# Altium PCB RobotCtrl.PcbDoc
Units mil, origin at the board's own origin, x right, y up, seen from the top; angles counter-clockwise.
Board outline 23735 x 12540 mil, 2 copper layers (Top Layer, Bottom Layer); 127 components, 102 nets, 564 pads, 4 vias.
Unrouted connection lines stored in the file: 342.
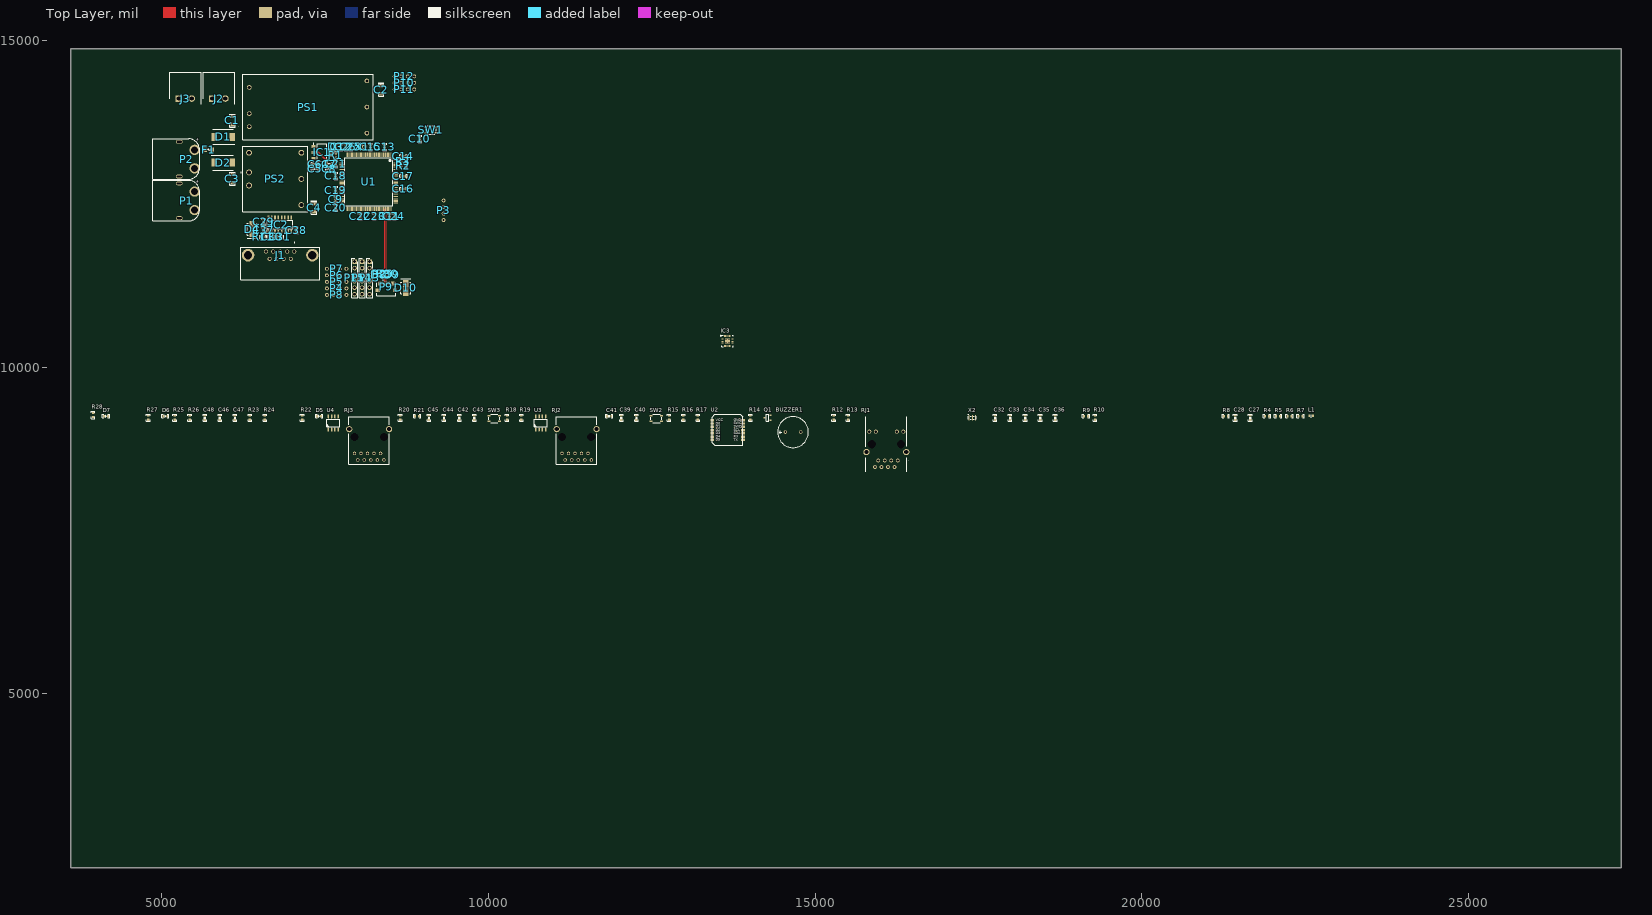
[diagram p0: Top Layer view]
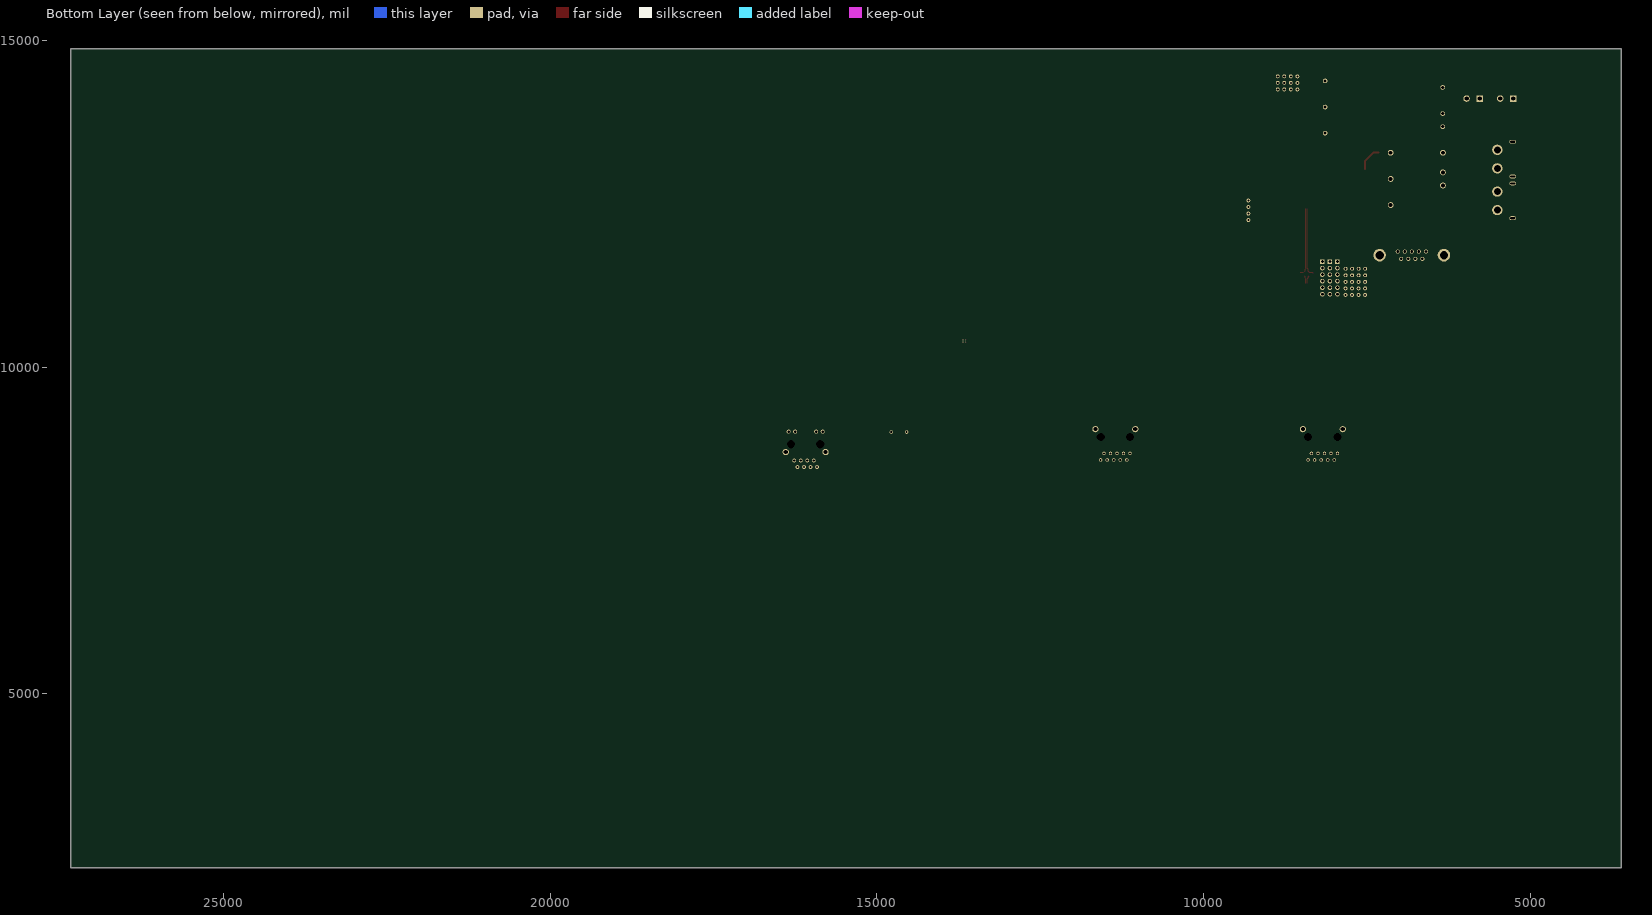
[diagram p1: Bottom Layer view, seen from below]

## Layer stack, top to bottom
Top Solder: solder mask 0.4, Solder Resist, Dk 3.5
Top Layer: signal copper 1.4
Dielectric 1: dielectric 12.6, FR-4, Dk 4.8
Bottom Layer: signal copper 1.4
Bottom Solder: solder mask 0.4, Solder Resist, Dk 3.5

## Board outline
3605,2335 3605,14875 27340,14875 27340,2335

## Design rules (kind name [scope] priority, off if disabled: settings)
Clearance [All] p1: gap=10 ignorepadtopadclearanceinfootprint=FALSE except(0: Arc-Arc Arc-Track Arc-SMDPad Track-Track Track-SMDPad SMDPad-SMDPad)
DiffPairsRouting [All] p1: maxlimit=10 minlimit=10 mostfreqgap=10 toplayer_minwidth=10 toplayer_maxwidth=15 toplayer_prefwidth=15 bottomlayer_minwidth=10 bottomlayer_maxwidth=15 bottomlayer_prefwidth=15 maxuncoupledlength=500
PlaneConnect [All] p1: planeconnectstyle=Direct reliefexpansion=20 reliefentries=4 reliefconductorwidth=10 reliefairgap=10
PolygonConnect [All] p1: connectstyle=Direct reliefconductorwidth=10 reliefentries=4 polygonreliefangle="90 Angle" airgapwidth=10
RoutingVias [All] p1: holewidth=17.72 width=29.53 viastyle="Through Hole" minholewidth=17.72 minwidth=29.53 maxholewidth=17.72 maxwidth=29.53
SolderMaskExpansion [All] p1: expansion=4 istentingtop=FALSE
Width [All] p1: maxlimit=1000 minlimit=10 preferedwidth=12
28 further rules are at their usual default settings.

## Classes and differential pairs
component class U_Power: C1 C2 C3 C4 C5 C6 C7 C8 D1 D2 D3 F1 IC1 J2 J3 P1 P2 PS1 PS2 R1
component class U_MCU: C9 C10 C11 C12 C13 C14 C15 C16 C17 C18 C19 C20 C21 C22 C23 C24 C25 C26 P3 R2 R3 SW1 U1 X1
component class U_Dev: BUZZER1 C27 C28 C29 C30 C31 C32 C33 C34 C35 C36 C37 C38 C39 C40 C41 C42 C43 C44 C45 C46 C47 C48 D4 D5 D6 D7 D8 D9 D10 IC2 IC3 J1 L1 P4 P5 P6 P7 P8 P9 P10 P11 P12 P13 P14 P15 Q1 R4 R5 R6 R7 R8 R9 R10 R11 R12 R13 R14 R15 R16 R17 R18 R19 R20 R21 R22 R23 R24 R25 R26 R27 R28 R29 R30 RJ1 RJ2 RJ3 SW2 SW3 U2 U3 U4 X2
differential pair USB_D: +USB_D_P -USB_D_N
differential pair CAN2: +CAN2_P -CAN2_N
differential pair CAN1: +CAN1_P -CAN1_N

## Components (designator, comment, footprint, x,y, rotation, side; value= is the part's Value field where it differs from the comment)
BUZZER1 "TMB12A12" DIP,P=7.6mm 14660,9005 r0 top
C1 "100nF" CAP-AUX-3216 6090,13760 r270 top
C2 "100nF" CAP-AUX-3216 8350,14260 r90 top
C3 "100nF" CAP-AUX-3216 6090,12870 r270 top
C4 "100nF" CAP-AUX-3216 7324,12453.66 r90 top
C5 "10uF" CAP-0603 7347.94,13034.23 r180 top
C6 "100nF" CAP-0603 7347.94,13108.11 r180 top
C7 "100nF" CAP-0603 7562.83,13108.11 r180 top
C8 "10uF" CAP-0603 7562.83,13034.23 r180 top
C9 "2.2uF" CAP-0603 7664.72,12571.1 r90 top
C10 "100nF" CAP-0603 8951.6,13492.15 r270 top
C11 "2.2uF" CAP-0603 8488.29,12305.59 r270 top
C12 "10uF" CAP-0603 7744.41,13368.71 r270 top
C13 "100nF" CAP-0603 8412.18,13368.71 r270 top
C14 "100nF" CAP-0603 8699.84,13226.04 r180 top
C15 "100nF" CAP-0603 8197.18,13368.71 r270 top
C16 "100nF" CAP-0603 8699.84,12727.15 r180 top
C17 "100nF" CAP-0603 8699.84,12922.15 r180 top
C18 "100nF" CAP-0603 7664.72,12926.1 r270 top
C19 "100nF" CAP-0603 7664.72,12710 r270 top
C20 "100nF" CAP-0603 7664.72,12438.9 r90 top
C21 "100nF" CAP-0603 7664.72,13108.95 r90 top
C22 "100nF" CAP-0603 8037.18,12305.59 r90 top
C23 "100nF" CAP-0603 8257.18,12305.59 r90 top
C24 "100nF" CAP-0603 8562.18,12305.59 r90 top
C25 "1uF" CAP-0603 7893.29,13368.71 r270 top
C26 "100nF" CAP-0603 7818.29,13368.71 r270 top
C27 "100nF" CAP-0603 21660,9225 r90 top
C28 "100nF" CAP-0603 21430,9225 r90 top
C29 "100nF" CAP-0603 6561.94,12225.17 r90 top
C30 "100nF" CAP-0603 6684.6,11993.4 r180 top
C31 "100nF" CAP-0603 6814.48,11993.4 r180 top
C32 "10pF" CAP-0603 17755,9225 r90 top
C33 "10pF" CAP-0603 17985,9225 r90 top
C34 "10pF" CAP-0603 18215,9225 r90 top
C35 "10pF" CAP-0603 18445,9225 r90 top
C36 "22nF" CAP-0603 18675,9225 r90 top
C37 "100nF" CAP-0603 6561.94,12095.28 r90 top
C38 "100nF" CAP-0603 7060,12095 r90 top
C39 "10uF" CAP-0603 12035,9225 r90 top
C40 "100nF" CAP-0603 12265,9225 r90 top
C41 "100nF" CAP-0603 11850,9250 r0 top
C42 "47nF" CAP-0603 9555,9225 r90 top
C43 "47nF" CAP-0603 9785,9225 r90 top
C44 "100nF" CAP-0603 9320,9225 r90 top
C45 "100nF" CAP-0603 9090,9225 r90 top
C46 "47nF" CAP-0603 5890,9225 r90 top
C47 "47nF" CAP-0603 6120,9225 r90 top
C48 "100nF" CAP-0603 5660,9225 r90 top
D1 "SS56" DO-214AB/SMC 5939.24,13523.72 r180 top
D2 "TPSMCJ30CA" DO-214AB/SMC 5939.24,13128.28 r0 top
D3 "RED" LED-0603 7664.72,13368.71 r90 top
D4 "SMBJ12CA" DO-214AA/SMB 6385.36,12111.07 r90 top
D5 "GREEN" LED-0603 7410,9250 r0 top
D6 "GREEN" LED-0603 5055,9250 r0 top
D7 "GREEN" LED-0603 4145,9250 r0 top
D8 "PESD0402-140" D-0402 8320.73,11411.47 r90 top
D9 "PESD0402-140" D-0402 8527.72,11411.47 r90 top
D10 "SMBJ15CA" DO-214AA/SMB 8733.71,11210.94 r270 top
F1 "7A 32V 快断" FUSE_1206 5720,13325 r0 top
IC1 "AMS1117-3.3" SOT-223 7448.39,13261.89 r270 top
IC2 "SP3232EEN-L/TR" SOIC-16_150mil 6809.6,12182 r90 top
IC3 "LAN8720A-CP-TR" QFN-24-4x4 13660,10400 r0 top
J1 "D-DMR009PF-D002" "Through Hole,P=2.77mm" 7029.14,11768.73 r0 top
J2 "WJ2EDGRC-5.08-2P" SHDRRA2W105P0X508_1X2_1206X1220X830P 5775.07,14110 r0 top
J3 "WJ2EDGRC-5.08-2P" SHDRRA2W105P0X508_1X2_1206X1220X830P 5260.73,14110 r0 top
L1 "220R/2A/0.05DCR" L-0603 22560,9255 r0 top
P1 "XT30/60" XT60PW-M 5504.87,12403.42 r90 top
P2 "XT30/60" XT60PW-M 5504.87,13041.54 r90 top
P3 "HDR1x4_2.54" HDR1x4_2.54_180 9315,12550 r0 top
P4 "HDR1x4_2.54" HDR1x4_2.54_180 7527,11205 r90 top
P5 "HDR1x4_2.54" HDR1x4_2.54_180 7527,11305 r90 top
P6 "HDR1x4_2.54" HDR1x4_2.54_180 7527,11405 r90 top
P7 "HDR1x4_2.54" HDR1x4_2.54_180 7527,11505 r90 top
P8 "HDR1x4_2.54" HDR1x4_2.54_180 7827,11105 r270 top
P9 "MicroQTJ" USB-MICRO 8437.29,11205 r0 top
P10 "HDR1x4_2.54" HDR1x4_2.54_180 8565,14350 r90 top
P11 "HDR1x4_2.54" HDR1x4_2.54_180 8865,14250 r270 top
P12 "HDR1x4_2.54" HDR1x4_2.54_180 8865,14450 r270 top
P13 "HDR1x6" HDR1X6_2.54_180 8182,11615 r270 top
P14 "HDR1x6" HDR1X6_2.54_180 8067,11615 r270 top
P15 "HDR1x6" HDR1X6_2.54_180 7952,11615 r270 top
PS1 "URB2412LD-30WR3" URB2412LD30WR3 6340,13680 r0 top
PS2 "URB2405YMD-15WR3" URB2405YMD15WR3 6336.65,12980 r90 top
Q1 "S9013" SOT-23-3 14270,9225 r0 top
R1 "4.7k" R-0603 7664.72,13238.83 r270 top
R2 "10k" R-0603 8699.84,13078.27 r180 top
R3 "120R" R-0603 8699.84,13152.15 r180 top
R4 "49.9R" R-0603 21915,9250 r0 top
R5 "49.9R" R-0603 22085,9250 r0 top
R6 "49.9R" R-0603 22260,9250 r0 top
R7 "49.9R" R-0603 22430,9250 r0 top
R8 "510R" R-0603 21285,9250 r0 top
R9 "510R" R-0603 19145,9250 r0 top
R10 "510R" R-0603 19285,9225 r90 top
R11 "10k" R-0603 6554.71,11993.4 r180 top
R12 "10k" R-0603 15285,9225 r90 top
R13 "12k" R-0603 15505,9225 r90 top
R14 "1k" R-0603 14010,9225 r90 top
R15 "4.7k" R-0603 12765,9225 r90 top
R16 "4.7k" R-0603 12985,9225 r90 top
R17 "10k" R-0603 13205,9225 r90 top
R18 "60R" R-0603 10285,9225 r90 top
R19 "60R" R-0603 10505,9225 r90 top
R20 "60R" R-0603 8650,9225 r90 top
R21 "60R" R-0603 8910,9250 r0 top
R22 "4.7k" R-0603 7150,9225 r90 top
R23 "60R" R-0603 6350,9225 r90 top
R24 "60R" R-0603 6580,9225 r90 top
R25 "60R" R-0603 5200,9225 r90 top
R26 "60R" R-0603 5430,9225 r90 top
R27 "4.7k" R-0603 4795,9225 r90 top
R28 "4.7k" R-0603 3950,9268.9 r90 top
R29 "10R" R-0603 8387.29,11425.14 r270 top
R30 "10R" R-0603 8461.17,11425.14 r270 top
RJ1 "HR911105A" HR911105A 16265,8570 r0 top
RJ2 "R-RJ45R10P-B000" RRJ45R10PB000 11575,8580 r0 top
RJ3 "R-RJ45R10P-B000" RRJ45R10PB000 8400,8580 r0 top
SW1 "KEY" KEY-4P-4.2*3.4*2.5 9120,13630 r180 top
SW2 "KEY" KEY-4P-4.2*3.4*2.5 12570,9215 r0 top
SW3 "KEY" KEY-4P-4.2*3.4*2.5 10090,9215 r0 top
U1 "STM32F407ZET6" STM-LQFP144_N 8168.28,12837.15 r270 top
U2 "WT931" WT931 12920,8640 r0 top
U3 "TJA1050" SOIC_8 10800,9145 r0 top
U4 "TJA1050" SOIC_8 7625,9145 r0 top
X1 "8MHz" SMD3213-3P 8070,13373.49 r0 top
X2 "25MHz" SMD3213-3P 17405,9225 r0 top

## Footprints (in the part's own frame and the unit in brackets; to place one, negate y for a bottom-side part, rotate by r counter-clockwise, add the part's x,y. Pads: shape width x height; smd on the part's side, far side on the other; paste and mask are expansions set on the pad)
CAP-0603 [mm]
  rect 0.8x0.96 smd: 1(-0.79,0) 2(0.79,0)
  silkscreen extent -1.42,-0.71 1.42,0.71, body extent -0.76,-0.39 0.76,0.39, height 0.9
CAP-AUX-3216 [mil] "îãµçÈÝ1206´óÐ¡"
  rect 50x60 smd: 1(44,-8) 2(-76,-8)
  silkscreen extent -111,-48 89,32, body extent -82,-45 52,26, height 67
D-0402 [mm]
  rect 0.7x0.65 smd: 1(-0.55,0) 2(0.55,0)
  silkscreen extent 0,-0.15 0,0.15, body extent -0.5,-0.25 0.5,0.25, height 0.43
DIP,P=7.6mm [mm]
  round 1.3 hole 0.8: 1(-2.952,0) 2(3.048,0)
  silkscreen extent -5.95,-6 6.04,6, body extent -5.95,-6 6.05,6, height 9.9
DO-214AA/SMB [mm]
  rect 2.85x2.25 smd: 1(1.675,0) 2(-1.675,0)
  silkscreen extent -3.6,-2 2.3,2, body extent -2.5,-1.97 2.5,1.97, height 2.44
DO-214AB/SMC [mm]
  rect 2.2x3.1 smd: 1(3.5,0) 2(-3.5,0)
  silkscreen extent -4.6,-2.95 3.97,2.95, body extent -3.97,-2.95 3.97,2.95, height 2.5
FUSE_1206 [mm]
  rect 1.3x1.7 smd: 1(-1.4,0) 2(1.4,0)
  silkscreen extent -0.53,-0.23 0.51,0.23, body extent -1.6,-0.8 1.6,0.8, height 1.01
HDR1x4_2.54_180 [mm]
  round 1.5 hole 0.813: 1(0,0) 2(0,-2.54) 3(0,-5.08) 4(0,-7.62)
  body extent -1.25,-8.89 1.25,1.27, height 8.2
HDR1X6_2.54_180 [mm]
  rect 1.725x1.725 hole 1.15: 1(0,0)
  round 1.725 hole 1.15: 2(2.54,0) 3(5.08,0) 4(7.62,0) 5(10.16,0) 6(12.7,0)
  silkscreen extent -1.27,-1.2 13.97,1.2, body extent -1.27,-1.2 13.97,1.2, height 8.58
HR911105A [mm]
  round 1.446 hole 0.89: 1(0,0) 2(-1.27,-2.54) 3(-2.54,0) 4(-3.81,-2.54) 5(-5.08,0) 6(-6.35,-2.54) 7(-7.62,0) 8(-8.89,-2.54)
  round 1.53 hole 1.02: 9(2.18,11.25) 10(-0.36,11.25) 11(-8.53,11.25) 12(-11.07,11.25)
  round 2.445 hole 1.63: MH1(3.3,3.3) MH2(-12.19,3.3)
  round 1.625 hole 3.25 unplated: MH3(1.27,6.35) MH4(-10.16,6.35)
  silkscreen extent -12.46,-4.3 4.1,17, body extent -12.39,-4.08 3.49,17.32, height 13.53
KEY-4P-4.2*3.4*2.5 [mm] "SKRPABE010"
  rect 1.2x0.65 smd: 1(-2.075,1.075) 1(2.075,1.075) 2(-2.075,-1.075) 2(2.075,-1.075)
  silkscreen extent -2.15,-1.6 2.05,1.6, body extent -2.35,-1.6 2.25,1.6, height 2.5
L-0603 [mm]
  rect 0.65x0.95 smd: 1(0,0) 2(1.5,0)
  silkscreen extent 0.57,-0.48 0.93,0.48, body extent -0.12,-0.48 1.63,0.48, height 0.35
LED-0603 [mm]
  rect 0.8x0.96 smd: 1(-0.79,0) 2(0.79,0)
  silkscreen extent -1.42,-0.71 1.42,0.71, body extent -0.81,-0.4 0.81,0.4, height 0.6
QFN-24-4x4 [mm] "QFN, 24-Leads, Body 4.00x4.00mm, Pitch 0.50mm, Thermal Pad 2.70x2.60mm, IPC Medium Density"
  oval 0.8x0.25 smd: 1(-1.95,1.25) 2(-1.95,0.75) 3(-1.95,0.25) 4(-1.95,-0.25) 5(-1.95,-0.75) 6(-1.95,-1.25) 13(1.95,-1.25) 14(1.95,-0.75) 15(1.95,-0.25) 16(1.95,0.25) 17(1.95,0.75) 18(1.95,1.25)
  oval 0.25x0.8 smd: 7(-1.25,-1.95) 8(-0.75,-1.95) 9(-0.25,-1.95) 10(0.25,-1.95) 11(0.75,-1.95) 12(1.25,-1.95) 19(1.25,1.95) 20(0.75,1.95) 21(0.25,1.95) 22(-0.25,1.95) 23(-0.75,1.95) 24(-1.25,1.95)
  rect 2x2 smd: 25(0,0)
  silkscreen extent -2.79,-2.2 2.2,2.2, body extent -2.07,-2.07 2.07,2.07, height 0.9
R-0603 [mm]
  rect 0.8x0.96 smd: 1(-0.79,0) 2(0.79,0)
  silkscreen extent -1.42,-0.71 1.42,0.71, body extent -0.76,-0.38 0.76,0.38, height 0.41
RRJ45R10PB000 [mm]
  round 1.3 hole 0.8: 1(0,0) 2(-1.27,2.54) 3(-2.54,0) 4(-3.81,2.54) 5(-5.08,0) 6(-6.35,2.54) 7(-7.62,0) 8(-8.89,2.54) 9(-10.16,0) 10(-11.43,2.54)
  round 1.6 hole 3.2 unplated: MH1(0,8.89) MH2(-11.43,8.89)
  round 2.4 hole 1.6: MH3(2.035,11.94) MH4(-13.465,11.94)
  silkscreen extent -13.61,-1.61 2.18,16.79, body extent -14.16,-1.61 2.74,16.79, height 13.45
SHDRRA2W105P0X508_1X2_1206X1220X830P [mm]
  rect 2.55x2.55 hole 1.7: 1(0,0)
  round 2.55 hole 1.7: 2(5.08,0)
  silkscreen extent -3.49,-2.2 8.77,10.2, body extent -3.49,-2.2 8.57,10, height 8.3
SMD3213-3P [mm]
  rect 0.4x2.1 smd: 1(-1.2,0) 2(0,0) 3(1.2,0)
  silkscreen extent -1.6,-0.65 1.6,1.27, body extent -1.6,-0.65 1.6,0.65, height 0.7
SOIC-16_150mil [mm]
  rect 1.5x0.65 smd: 1(-2.7,4.445) 2(-2.7,3.175) 3(-2.7,1.905) 4(-2.7,0.635) 5(-2.7,-0.635) 6(-2.7,-1.905) 7(-2.7,-3.175) 8(-2.7,-4.445) 9(2.7,-4.445) 10(2.7,-3.175) 11(2.7,-1.905) 12(2.7,-0.635) 13(2.7,0.635) 14(2.7,1.905) 15(2.7,3.175) 16(2.7,4.445)
  silkscreen extent -3.45,-4.95 1.6,5.12, body extent -3,-4.95 3,4.95, height 1.75
SOIC_8 [mil]
  oval 24x60 smd: 1(-75,-100.02) 2(-25,-100.02) 3(25,-100.02) 4(75,-100.02) 5(75,99.98) 6(25,99.98) 7(-25,99.98) 8(-75,99.98)
  silkscreen extent -100,-55 100,55, body extent -96,-118 96,118, height 69
SOT-23-3 [mil]
  rect 30x24 smd: 1(47,-38) 2(47,38) 3(-47,0)
  silkscreen extent -21,-53 21,53, body extent -55,-57 55,57, height 51
SOT-223 [mm]
  rect 1.1x1.55 smd: 1(-2.91,-3.197) 2(-0.61,-3.197) 3(1.69,-3.197)
  rect 3.45x1.55 smd: 4(-0.61,3.553)
  silkscreen extent -4.11,-3.3 2.74,2.03, body extent -3.88,-3.38 2.62,3.58, height 1.7
STM-LQFP144_N [mm] "Thin QFP, 144-Leads, Body 20x20mm, Pitch 0.5mm, IPC Medium Density"
  oval 1.8x0.3 smd: 1(-10.55,8.75) 2(-10.55,8.25) 3(-10.55,7.75) 4(-10.55,7.25) 5(-10.55,6.75) 6(-10.55,6.25) 7(-10.55,5.75) 8(-10.55,5.25) 9(-10.55,4.75) 10(-10.55,4.25) 11(-10.55,3.75) 12(-10.55,3.25) 13(-10.55,2.75) 14(-10.55,2.25) 15(-10.55,1.75) 16(-10.55,1.25) 17(-10.55,0.75) 18(-10.55,0.25) 19(-10.55,-0.25) 20(-10.55,-0.75) 21(-10.55,-1.25) 22(-10.55,-1.75) 23(-10.55,-2.25) 24(-10.55,-2.75) 25(-10.55,-3.25) 26(-10.55,-3.75) 27(-10.55,-4.25) 28(-10.55,-4.75) 29(-10.55,-5.25) 30(-10.55,-5.75) 31(-10.55,-6.25) 32(-10.55,-6.75) 33(-10.55,-7.25) 34(-10.55,-7.75) 35(-10.55,-8.25) 36(-10.55,-8.75) 73(10.55,-8.75) 74(10.55,-8.25) 75(10.55,-7.75) 76(10.55,-7.25) 77(10.55,-6.75) 78(10.55,-6.25) 79(10.55,-5.75) 80(10.55,-5.25) 81(10.55,-4.75) 82(10.55,-4.25) 83(10.55,-3.75) 84(10.55,-3.25) 85(10.55,-2.75) 86(10.55,-2.25) 87(10.55,-1.75) 88(10.55,-1.25) 89(10.55,-0.75) 90(10.55,-0.25) 91(10.55,0.25) 92(10.55,0.75) 93(10.55,1.25) 94(10.55,1.75) 95(10.55,2.25) 96(10.55,2.75) 97(10.55,3.25) 98(10.55,3.75) 99(10.55,4.25) 100(10.55,4.75) 101(10.55,5.25) 102(10.55,5.75) 103(10.55,6.25) 104(10.55,6.75) 105(10.55,7.25) 106(10.55,7.75) 107(10.55,8.25) 108(10.55,8.75)
  oval 0.3x1.8 smd: 37(-8.75,-10.55) 38(-8.25,-10.55) 39(-7.75,-10.55) 40(-7.25,-10.55) 41(-6.75,-10.55) 42(-6.25,-10.55) 43(-5.75,-10.55) 44(-5.25,-10.55) 45(-4.75,-10.55) 46(-4.25,-10.55) 47(-3.75,-10.55) 48(-3.25,-10.55) 49(-2.75,-10.55) 50(-2.25,-10.55) 51(-1.75,-10.55) 52(-1.25,-10.55) 53(-0.75,-10.55) 54(-0.25,-10.55) 55(0.25,-10.55) 56(0.75,-10.55) 57(1.25,-10.55) 58(1.75,-10.55) 59(2.25,-10.55) 60(2.75,-10.55) 61(3.25,-10.55) 62(3.75,-10.55) 63(4.25,-10.55) 64(4.75,-10.55) 65(5.25,-10.55) 66(5.75,-10.55) 67(6.25,-10.55) 68(6.75,-10.55) 69(7.25,-10.55) 70(7.75,-10.55) 71(8.25,-10.55) 72(8.75,-10.55) 109(8.75,10.55) 110(8.25,10.55) 111(7.75,10.55) 112(7.25,10.55) 113(6.75,10.55) 114(6.25,10.55) 115(5.75,10.55) 116(5.25,10.55) 117(4.75,10.55) 118(4.25,10.55) 119(3.75,10.55) 120(3.25,10.55) 121(2.75,10.55) 122(2.25,10.55) 123(1.75,10.55) 124(1.25,10.55) 125(0.75,10.55) 126(0.25,10.55) 127(-0.25,10.55) 128(-0.75,10.55) 129(-1.25,10.55) 130(-1.75,10.55) 131(-2.25,10.55) 132(-2.75,10.55) 133(-3.25,10.55) 134(-3.75,10.55) 135(-4.25,10.55) 136(-4.75,10.55) 137(-5.25,10.55) 138(-5.75,10.55) 139(-6.25,10.55) 140(-6.75,10.55) 141(-7.25,10.55) 142(-7.75,10.55) 143(-8.25,10.55) 144(-8.75,10.55)
  silkscreen extent -10.67,-9.25 9.25,9.58, body extent -10,-10 10,10, height 1.6
"Through Hole,P=2.77mm" [mil]
  round 61.46 hole 40.98: 1(0,0) 2(-107.99,0) 3(-215.98,0) 4(-323.98,0) 5(-431.97,0) 6(-54.02,-111.97) 7(-162.01,-111.97) 8(-270,-111.97) 9(-377.99,-111.97)
  round 192.01 hole 128: MH1(-707.99,-55.98) MH2(276.02,-55.98)
  silkscreen extent -822,-430 391,141, body extent -826,-679 394,65, height 477
URB2405YMD15WR3 [mm]
  round 2.25 hole 1.5: 1(7.62,0) 2(0,0) 3(-5.08,0) 4(-12.7,-20.32) 5(-2.54,-20.32) 6(7.62,-20.32)
  silkscreen extent -15.24,-22.86 10.16,3.2, body extent -15.24,-22.86 10.16,2.54, height 12.3
URB2412LD30WR3 [mm]
  round 1.8 hole 1.2: 1(0,15.24) 2(0,5.08) 3(0,0) 4(45.72,-2.54) 5(45.72,7.62) 6(45.72,17.78)
  silkscreen extent -4.1,-5.08 48.26,20.32, body extent -2.54,-5.08 48.26,20.32, height 16.9
USB-MICRO [mm]
  rect 0.45x1.38 smd: 1(-1.3,1.975) 2(-0.65,1.975) 3(0,1.975) 4(0.65,1.975) 5(1.3,1.975)
  rect 1.65x1.3 smd: EH(-3.375,-0.685) EH(3.375,-0.685)
  rect 1.425x1.55 smd: EH(-2.487,1.89) EH(2.487,1.89)
  silkscreen extent -3.75,-2.84 3.75,3.26, body extent -3.9,-2.5 3.9,2.5, height 2.72
WT931 [mm]
  rect 1.4x0.9 smd: 1(12.812,13.866) 2(12.812,7.516) 3(12.812,8.786) 4(12.812,10.056) 5(12.812,6.246) 5(12.812,11.326) 6(12.812,12.596) 8(24.812,13.866) 9(24.812,12.596) 10(24.812,11.326) 11(24.812,10.056) 12(24.812,8.786) 13(24.812,7.516) 14(24.812,6.246)
  silkscreen extent 12.79,4.21 24.79,16.21, body extent 12.83,4.19 24.77,16.13, height 1.5
XT60PW-M [mm]
  oval 1.5x2.5 hole 0.7 slot 1.8 at 90 deg: 0(-3.15,6) 0(10.35,6)
  round 4 hole 2.7: 1(7.2,0) 2(0,0)
  silkscreen extent -4.2,-1.9 11.5,16.3, body extent -4.3,-1.95 11.6,16.35, height 8.45

## Part data
BUZZER1: library part BUZZER, "TMB12A12 有源蜂鸣器"
C1 C2 C3 C4: library part CAP-POL, "KM101M050F115A", Package=3528, SuppliersPartNumber=C16133, ComponentLink1Description=供应商链接, ComponentLink1URL=http://www.szlcsc.com/product/details_16815.html, Supplier=LC
C5 C6 C7 C8 C9 C10 C11 C12 C13 C14 C15 C16 C17 C18 C19 C20 C21 C22 C23 C24 C25 C26 C27 C28 C29 C30 C31 C32 C33 C34 C35 C36 C37 C38 C39 C40 C41 C42 C43 C44 C45 C46 C47 C48: library part CAP, "贴片电容", Package=0402, SuppliersPartNumber=C52923, ComponentLink1Description=供应商链接, ComponentLink1URL=http://www.szlcsc.com/product/details_53938.html, Supplier=LC
D1: library part DIODE_Schottky, "肖特基二极管"
D2 D4 D8 D9 D10: library part TVS_C
D3 D5 D6 D7: library part LED, "发光二极管", Package=0603, SuppliersPartNumber=C2290, ComponentLink1Description=供应商链接, ComponentLink1URL=http://www.szlcsc.com/product/details_2663.html, Supplier=LC
F1: library part Fuse, "0437007.WR"
IC1: library part AMS1117, "AMS1117-3.3 1.0A", Manufacturer_Name=Nexperia, Manufacturer_Part_Number=SI2302DS, Mouser Part Number=N/A, RS Part Number=7983053P, Datasheet Link=https://assets.nexperia.com/documents/data-sheet/SI2302DS.pdf, Height=1.1mm, Mouser Price/Stock=https://www.mouser.com/Search/Refine.aspx?Keyword=N%2FA, RS Price/Stock=http://uk.rs-online.com/web/p/products/7983053P
IC2: library part SP3232EEN, "RS232 芯片", Manufacturer_Name=MaxLinear, Mouser Part Number=701-SP3232EEN-L/TR, Arrow Part Number=SP3232EEN-L/TR, Arrow Price/Stock=https://www.arrow.com/en/products/sp3232een-ltr/maxlinear-inc, Datasheet Link=https://www.maxlinear.com/ds/sp3222e_sp3232e.pdf, Height=1.75mm, Manufacturer_Part_Number=SP3232EEN-L/TR, Mouser Price/Stock=https://www.mouser.co.uk/ProductDetail/MaxLinear/SP3232EEN-L-TR?qs=Hy8V1%2FADhVKNh9v9NvoeCw%3D%3D
IC3: "Integrated Circuit", Manufacturer_Name=Microchip, Mouser Part Number=886-LAN8720A-CP-TR, Arrow Part Number=LAN8720A-CP-TR, Arrow Price/Stock=https://www.arrow.com/en/products/lan8720a-cp-tr/microchip-technology?region=nac, Datasheet Link=https://componentsearchengine.com/Datasheets/1/LAN8720A-CP-TR.pdf, Height=1mm, Manufacturer_Part_Number=LAN8720A-CP-TR, Mouser Price/Stock=https://www.mouser.co.uk/ProductDetail/Microchip-Technology/LAN8720A-CP-TR?qs=pA5MXup5wxG3QiSvrqf%2FHQ%3D%3D
J1: library part DB9, "D-Sub 连接器", Arrow Part Number=5747844-5, Manufacturer_Name="TE Connectivity", Mouser Part Number=571-5747844-5, Arrow Price/Stock=https://www.arrow.com/en/products/5747844-5/te-connectivity, Datasheet Link=http://www.te.com/commerce/DocumentDelivery/DDEController?Action=srchrtrv&DocNm=82068_AMPLIMITE_Right-Angle_Posted_Conn&DocType=Catalog+Section&DocLang=English&PartCntxt=, Height=12.9286mm, Manufacturer_Part_Number=5747844-5, Mouser Price/Stock=https://www.mouser.co.uk/ProductDetail/TE-Connectivity/5747844-5?qs=x6EjVpvqMVPrkQsJHUlJGw%3D%3D
J2 J3: "Connector", Manufacturer_Name="Ningbo Kangnex", Datasheet Link=https://datasheet.lcsc.com/szlcsc/Ningbo-Kangnex-Elec-WJ2EDGRC-5-08-2P_C3697.pdf, Height=8.3mm, Manufacturer_Part_Number=WJ2EDGRC-5.08-2P
L1: library part BEAD, "BLM18KG221SN1D", Package=0402, SuppliersPartNumber=C32041, ComponentLink1Description=供应商链接, ComponentLink1URL=http://www.szlcsc.com/product/details_33003.html, Supplier=LC
P3 P4 P5 P6 P7 P8 P10 P11 P12: "Header"
P9: library part USB_MICRO, "USB_MICRO"
P13 P14 P15: library part HDR1x6_2.54, "Header"
PS1: "金升阳隔离电源", Manufacturer_Name=Mornsun, Manufacturer_Part_Number=URB2412LD-30WHR3, Datasheet Link=https://4donline.ihs.com/images/VipMasterIC/IC/MNSN/MNSN-S-A0002273855/MNSN-S-A0002273855-1.pdf?hkey=EF798316E3902B6ED9A73243A3159BB0, Height=16.8mm
PS2: "金升阳隔离电源", Manufacturer_Name=Mornsun, Manufacturer_Part_Number=URB2405YMD-10WR3, Datasheet Link=https://www.mornsun-power.com/html/pdf/URB2405YMD-10WR3.html, Height=12.2mm
Q1: library part BJT_NPN
R1 R2 R3 R4 R5 R6 R7 R8 R9 R10 R11 R12 R13 R14 R15 R16 R17 R18 R19 R20 R21 R22 R23 R24 R25 R26 R27 R28 R29 R30: library part RES, "贴片电阻", Package=0805, SuppliersPartNumber=C17798, Supplier=LC
RJ1: library part RJ45_LED
RJ2 RJ3: library part RJ45
SW1 SW2 SW3: "按键开关"
U1: "ARM Cortex-M4 32-bit MCU+FPU, 210 DMIPS, 512 kB Flash, 192 kB Internal RAM, 114 I/Os, 144-pin LQFP, -40 to 85 degC, Tray", I/Os (High Current)=114, Manufacturer=STMicroelectronics, Operating Frequency(F) (Processor speed) (MHz)=168, Supplier Part Number 1=497-11903-ND, Supply Voltage(Vcc) max (V)=3.6, Supply Voltage(Vcc) min (V)=1.8, ComponentLink1Description="Manufacturer URL", ComponentLink1URL=http://www.st.com/web/en/home.html, ComponentLink2Description=Datasheet, ComponentLink2URL=http://www.st.com/st-web-ui/static/active/en/resource/technical/document/datasheet/DM00037051.pdf, ComponentLink3Description="Package Specification", ComponentLink3URL=http://www.st.com/st-web-ui/static/active/en/resource/technical/document/datasheet/DM00037051.pdf, Core="ARM Cortex-M4", D/A Converter=2x12-bit, DatasheetVersion="Rev. 4", FLASH Size (Prog) (kB)=512, Internal RAM Size (kB)=192, Mounting Technology="Surface Mount", PackageDescription="144-Pin Low Profile Quad Flat Package, 20 x 20 mm Body, 0.5 mm Pitch", PackageReference=LQFP144, PackageVersion="Rev. 4, 06/2013", Packing=Tray, PartNumber=STM32F407ZET6, Supplier 1=Digi-Key, Supplier 2=Farnell, Supplier 3=Newark, Supplier 4=Newark, Supplier 5=Mouser, Supplier Part Number 2=2215229, Supplier Part Number 3=46W2203, Supplier Part Number 4=87T3795, Supplier Part Number 5=511-STM32F407ZET6
U2: "陀螺仪模组"
U3 U4: "CAN 控制器（5V）"
X1: library part XTAL, "CSTCE8M00G15C99-R0"
X2: library part XTAL, "CSTCE25M00G51-R0"

## Via types
v1: diameter 23.86, hole 11.81, Top Layer to Bottom Layer, 4 vias

## Nets (pads, with @x,y where several pads share a name; then routed paths per layer and width w, separated by ;. In a path a pad name is that pad's centre, name@x,y a point inside that pad or via, vN(x,y) a via of type N, cw(c..) or ccw(c..) an arc to the next point about the centre after c; other vN are vias at no path point)
CAN1_N: R20.2 R21.1 RJ2.2 U3.6
CAN1_P: R18.1 R19.2 RJ2.1 U3.7
CAN2_N: R25.2 R26.1 RJ3.2 U4.6
CAN2_P: R23.1 R24.2 RJ3.1 U4.7
GBAT: C1.2 C3.2 D2.1 P1.2 P2.2 PS1.2 PS2.2
GND: C2.2 C4.2 C5.1 C6.1 C7.1 C8.1 C9.2 C10.1 C11.2 C12.1 C13.1 C14.1 C15.1 C16.1 C17.1 C18.1 C19.1 C20.1 C21.1 C22.1 C23.1 C24.1 C25.1 C26.1 C27.1 C28.1 C29.1 C32.1 C33.1 C34.1 C35.1 C36.1 C37.1 C38.1 C39.2 C40.2 C41.1 C42.2 C43.2 C44.1 C45.1 C46.2 C47.2 C48.1 D3.2 D4.1 D5.2 D6.2 D7.2 D8.1 D9.1 D10.2 IC1.1 IC2.15 IC3.25 J1.5 J2.2 J3.2 P3.1 P4.4 P5.4 P6.4 P7.4 P8.4 P9.5 P12.1 P12.2 P12.3 P12.4 P15.1 P15.2 P15.3 P15.4 P15.5 P15.6 PS1.5 PS2.6 Q1.2 R2.1 R9.1 R10.1 R11.1 R12.2 R13.2 R17.1 RJ1.7 RJ1.8 RJ1.MH1 RJ1.MH2 RJ1.MH3 RJ1.MH4 RJ2.MH1 RJ2.MH2 RJ2.MH3 RJ2.MH4 RJ3.MH1 RJ3.MH2 RJ3.MH3 RJ3.MH4 SW1.2 SW2.2 SW3.2 U1.16 U1.31 U1.38 U1.51 U1.61 U1.83 U1.94 U1.107 U1.120 U1.130 U2.8 U3.2 U3.8 U4.2 U4.8 X1.2 X2.2
  other v1: 13638.35,10378.35 13681.65,10378.35 13638.35,10421.65 13681.65,10421.65
LED_LINK: IC3.3 RJ1.9
LED_SPEED: IC3.2 RJ1.10
NetBUZZER1_2: BUZZER1.2 Q1.3
NetC9_1: C9.1 U1.71
NetC10_2: C10.2 SW1.1 U1.25
NetC11_1: C11.1 U1.106
NetC30_1: C30.1 IC2.3
NetC30_2: C30.2 IC2.1
NetC31_1: C31.1 IC2.5
NetC31_2: C31.2 IC2.4
NetC32_2: C32.2 IC3.21 R4.1 RJ1.1
NetC33_2: C33.2 IC3.20 R5.1 RJ1.2
NetC34_2: C34.2 IC3.23 R6.1 RJ1.3
NetC35_2: C35.2 IC3.22 R7.1 RJ1.6
NetC37_2: C37.2 IC2.2
NetC38_2: C38.2 IC2.6
NetC41_2: C41.2 SW2.1 U1.2
NetC42_1: C42.1 R18.2 R20.1
NetC43_1: C43.1 R19.1 R21.2
NetC45_2: C45.2 SW3.1 U1.1
NetC46_1: C46.1 R23.2 R25.1
NetC47_1: C47.1 R24.1 R26.2
NetD1_1: D1.1 D2.2 F1.2
NetD3_A: D3.1 R1.1
NetD4_2: D4.2 J1.MH1 J1.MH2 R11.2
NetD5_A: D5.1 R22.1
NetD6_A: D6.1 R27.1
NetD7_A: D7.1 R28.1
NetD10_1: D10.1 P9.EH
NetF1_1: F1.1 P1.1 P2.1
NetIC2_9: IC2.9 U1.70
NetIC2_10: IC2.10 U1.69
NetIC3_4: IC3.4 X2.1
NetIC3_5: IC3.5 X2.3
NetIC3_7: IC3.7 U1.45
NetIC3_8: IC3.8 U1.44
NetIC3_11: IC3.11 U1.43
NetIC3_12: IC3.12 R8.1
NetIC3_13: IC3.13 U1.27
NetIC3_14: IC3.14 U1.35
NetIC3_15: IC3.15 R12.1 U1.117
NetIC3_16: IC3.16 U1.126
NetIC3_17: IC3.17 U1.128
NetIC3_18: IC3.18 U1.129
NetIC3_24: IC3.24 R13.1
NetP3_2: P3.2 U1.109
NetP3_3: P3.3 U1.105
NetP4_2: P4.2 U1.76
NetP4_3: P4.3 U1.81
NetP5_2: P5.2 U1.77
NetP5_3: P5.3 U1.82
NetP6_2: P6.2 U1.78
NetP6_3: P6.3 U1.85
NetP7_2: P7.2 U1.79
NetP7_3: P7.3 U1.86
NetP8_2: P8.2 U1.80
NetP8_3: P8.3 U1.37
NetP9_2: P9.2 R29.2 | length 123.2
  Top Layer w10: R29.2 8390.44,11394.04 8401.18,11383.29 8401.18,11365.82 8411.7,11355.3 P9.2
NetP9_3: P9.3 R30.2 | length 123.2
  Top Layer w10: P9.3@8436.76,11282.76 8436.76,11355.3 8447.27,11365.82 8447.27,11383.29 8458.02,11394.04 R30.2
NetP11_1: P11.1 U1.12
NetP11_2: P11.2 U1.13
NetP11_3: P11.3 U1.14
NetP11_4: P11.4 U1.15
NetP13_1: P13.1 U1.88
NetP13_2: P13.2 U1.89
NetP13_3: P13.3 U1.90
NetP13_4: P13.4 U1.91
NetP13_5: P13.5 U1.92
NetP13_6: P13.6 U1.93
NetQ1_1: Q1.1 R14.2 R17.2
NetR2_2: R2.2 U1.138
NetR3_2: R3.2 U1.143
NetR8_2: R8.2 U1.36
NetR9_2: R9.2 RJ1.12
NetR10_2: R10.2 RJ1.11
NetR14_1: R14.1 U1.99
NetR15_1: R15.1 U1.11 U2.11
NetR16_1: R16.1 U1.10 U2.12
NetR22_2: R22.2 U1.96
NetR27_2: R27.2 U1.97
NetR28_2: R28.2 U1.98
NetU1_23: U1.23 X1.3
NetU1_24: U1.24 X1.1
NetU1_73: U1.73 U4.1
NetU1_74: U1.74 U4.4
NetU1_114: U1.114 U3.1
NetU1_115: U1.115 U3.4
RS232_RX: IC2.8 J1.3
RS232_TX: IC2.7 J1.2
USB_D_N: D8.2 R29.1 U1.103 | length 1055.2
  Top Layer w10: D8.2 8320.73,11434.1 8328.53,11441.9 8334.29,11441.9 8334.39,11442 8347,11442 8351,11446 8377.04,11446 R29.1 8390.25,11456.25 8401,11466.99 8401,11499 8414.34,11512.34 U1.103
USB_D_P: D9.2 R30.1 U1.104 | length 1028.7
  Top Layer w10: U1.104@8434.11,12421.8 8434.11,11512.34 8447.46,11499 8447.46,11466.99 8458.2,11456.25 R30.1 ; R30.1@8471.42,11446 8497.46,11446 8501.46,11442 8514.07,11442 8514.17,11441.9 D9.2@8519.93,11441.9
VBAT: C1.1 C3.1 D1.2 PS1.3 PS2.3
VBUS: C4.1 C5.2 C6.2 C44.2 C48.2 IC1.3 P4.1 P5.1 P6.1 P7.1 P8.1 P9.1 PS2.1 PS2.4 U3.3 U4.3
VCC_3V3: BUZZER1.1 C7.2 C8.2 C12.2 C13.2 C14.2 C15.2 C16.2 C17.2 C18.2 C19.2 C20.2 C21.2 C22.2 C23.2 C24.2 C25.2 C26.2 C27.2 C28.2 C29.2 C39.1 C40.1 IC1.2 IC2.16 IC3.9 L1.1 L1.2 P3.4 P14.1 P14.2 P14.3 P14.4 P14.5 P14.6 R1.2 R3.1 R15.2 R16.2 U1.6 U1.17 U1.30 U1.32 U1.33 U1.39 U1.52 U1.62 U1.72 U1.84 U1.95 U1.108 U1.121 U1.131 U1.144 U2.1 | length 383.2
  Top Layer w30: IC1.2 7399.11,13285.89 7531.73,13153.27 C8.2
VCC_3V3E: C36.2 IC3.1 IC3.19 R4.2 R5.2 R6.2 R7.2 RJ1.4 RJ1.5
VCC_12V: C2.1 J2.1 J3.1 P10.1 P10.2 P10.3 P10.4 PS1.1 PS1.4
pads on no net: IC1.4 IC2.11 IC2.12 IC2.13 IC2.14 IC3.6 IC3.10 J1.1 J1.4 J1.6 J1.7 J1.8 J1.9 P1.0 P2.0 P9.4 PS1.6 PS2.5 RJ2.3 RJ2.4 RJ2.5 RJ2.6 RJ2.7 RJ2.8 RJ2.9 RJ2.10 RJ3.3 RJ3.4 RJ3.5 RJ3.6 RJ3.7 RJ3.8 RJ3.9 RJ3.10 U1.3 U1.4 U1.5 U1.7 U1.8 U1.9 U1.18 U1.19 U1.20 U1.21 U1.22 U1.26 U1.28 U1.29 U1.34 U1.40 U1.41 U1.42 U1.46 U1.47 U1.48 U1.49 U1.50 U1.53 U1.54 U1.55 U1.56 U1.57 U1.58 U1.59 U1.60 U1.63 U1.64 U1.65 U1.66 U1.67 U1.68 U1.75 U1.87 U1.100 U1.101 U1.102 U1.110 U1.111 U1.112 U1.113 U1.116 U1.118 U1.119 U1.122 U1.123 U1.124 U1.125 U1.127 U1.132 U1.133 U1.134 U1.135 U1.136 U1.137 U1.139 U1.140 U1.141 U1.142 U2.2 U2.3 U2.4 U2.5 U2.6 U2.9 U2.10 U2.13 U2.14 U3.5 U4.5

## Silkscreen, mask and mechanical layers (free items; w line width, h text height)
Mechanical 1:
  the board outline again, w10

## Text inside footprints (layer, text, board x,y; h text height)
P1: Top Overlay "+" at 5583.61,12816.8 h78.74 r90
P2: Top Overlay "+" at 5583.61,13454.92 h78.74 r90
U2: Top Overlay "TX" at 13757.8,8868.1 h39.37; Top Overlay "RX" at 13757.8,8921.9 h39.37; Top Overlay "SDA" at 13757.8,8971.9 h39.37; Top Overlay "SCL" at 13757.8,9021.9 h39.37; Top Overlay "SWD" at 13757.8,9071.9 h39.37; Top Overlay "SWC" at 13757.8,9121.9 h39.37; Top Overlay "GND" at 13757.8,9171.9 h39.37; Top Overlay "D5" at 13481,8870.5 h39.37; Top Overlay "D4" at 13481,8920.5 h39.37; Top Overlay "D3" at 13481,8970.5 h39.37; Top Overlay "D2" at 13481,9020.5 h39.37; Top Overlay "D1" at 13481,9070.5 h39.37; Top Overlay "D0" at 13481,9120.5 h39.37; Top Overlay "VCC" at 13481,9170.5 h39.37